# Altium PCB ATmega_2560_Pro.PcbDoc (part 4 of 4)
Units mil, origin at the board's own origin, x right, y up, seen from the top; angles counter-clockwise.
Board outline 2060 x 2060 mil, 4 copper layers (L1, L2, L3, L4), stack 61.583 mil thick; 50 components, 94 nets, 313 pads, 190 vias.
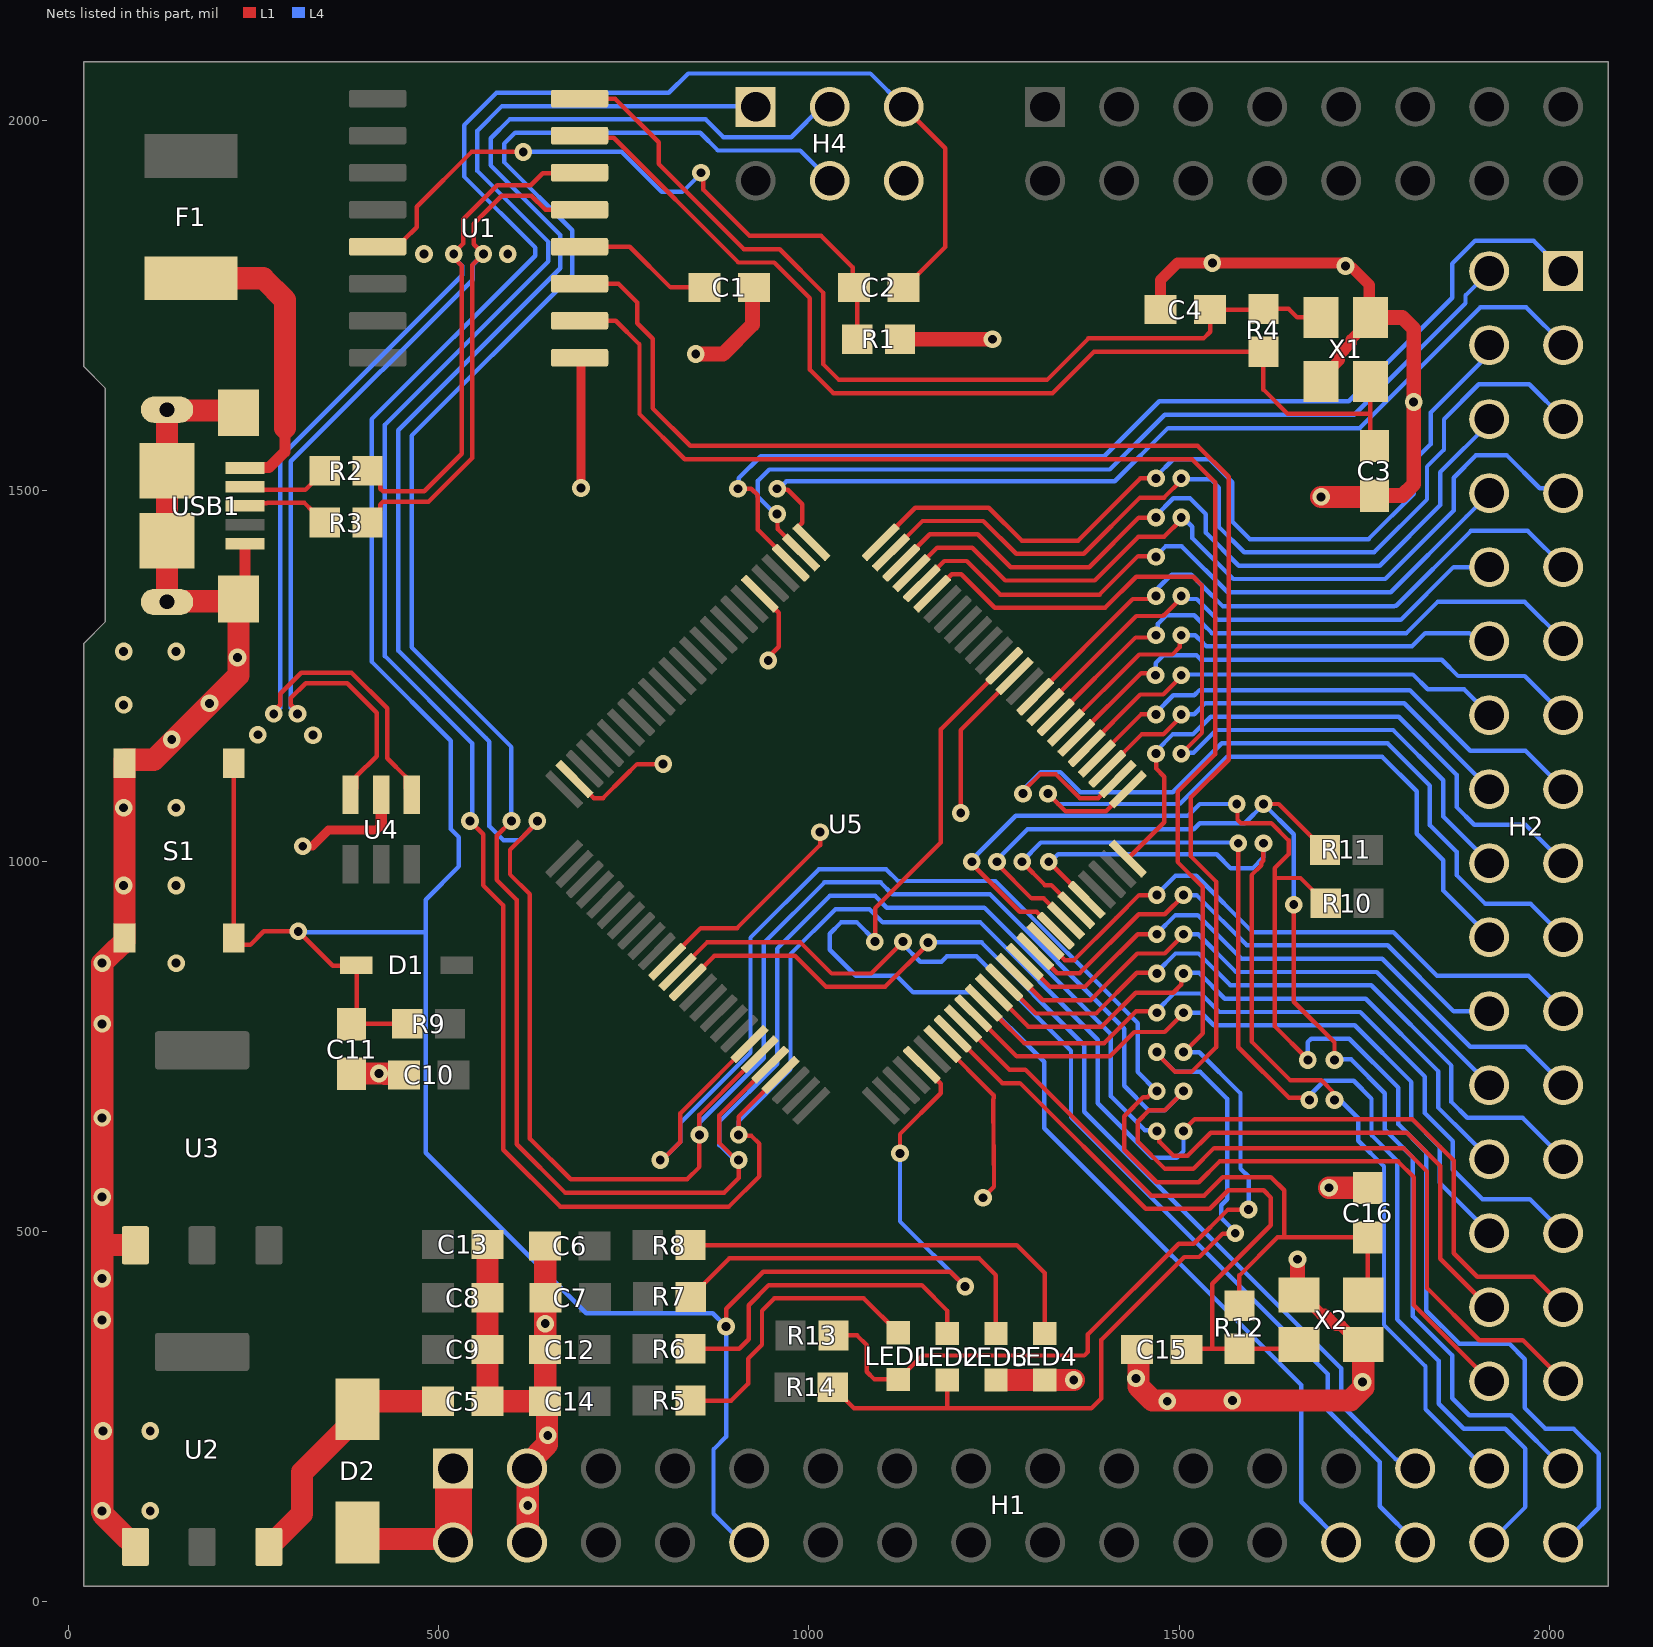
[diagram p4: the nets of this part, all layers, seen from the top]

## Via types
v1: diameter 24, hole 12, L1 to L4, tented both sides, 190 vias

## Nets (pads, with @x,y where several pads share a name; then routed paths per layer and width w, separated by ;. In a path a pad name is that pad's centre, name@x,y a point inside that pad or via, vN(x,y) a via of type N, cw(c..) or ccw(c..) an arc to the next point about the centre after c; other vN are vias at no path point) (continued)
D15: H1.26 U5.63 | length 1714.7
  L1 w6: v1(1089,891) 1089.31,891.31 1089.31,936.31 1178,1025 1178,1177.75 1244.48,1244.24 1244.48,1244.48 U5.63@1263.8,1263.8
  L4 w6: v1(1089,891) 1089,892.77 1064.77,917 1043.23,917 1028,901.77 1028,880.23 1063.23,845 1118.32,845 1140.91,822.4 1224.4,822.4 1318,728.81 1318,639 1665,292 1665,134.23 H1.26@1720,79.23
D16: H1.27 U5.13 | length 1417.8
  L1 w6: U5.13@816.63,816.88 U5.13@816.88,816.88 ; U5.13@836.2,836.2 836.44,836.2 872.24,872 981,872 1023,830 1102.77,830 1161,888.23 v1(1161,890)
  L4 w6: v1(1161,890) 1233.18,890 1372,751.18 1372,661.37 1719,314.37 1719,265.46 1793.06,191.4 1795.4,191.4 1807.57,179.23 H1.27@1820,179.23
D17: H1.28 U5.12 | length 1510.3
  L1 w6: U5.12@822.28,850.12 862.16,890 988.46,890 1030.46,848 1084,848 v1(1127,891)
  L4 w6: v1(1127,891) 1127,887.23 1150.23,864 1179,864 1186.36,871.36 1226.36,871.36 1354,743.72 1354,653.91 1701,306.91 1701,258 1771,188 1771,128.23 H1.28@1820,79.23
D18: H1.29 U5.46 | length 1411
  L1 w6: v1(1324,999) 1324,998.86 1375.16,947.7 U5.46@1375.16,947.55 ; v1@1614,1025 1614,1000.57 1611,997.57 1611,994 1598,981 1598,756 1650,704 1692,704 v1@1710,686
  L4 w6: v1(1324,999) 1326.51,999 1336.51,1009 1551,1009 1570,990 1599.11,990 1614,1004.89 v1(1614,1024) ; v1@1710,680 1714.33,680 1742,652.33 1742,622.22 1776.89,587.33 1776.89,373.2 1833,317.09 1833,259.09 1912.86,179.23 H1.29@1920,179.23
  other v1: 1710,677
D19: H1.30 U5.45 | length 1648.6
  L1 w6: v1(1288,999) 1288,998.23 1318.76,967.47 1327.15,967.47 1360.99,933.63 U5.45@1361.24,933.63 ; v1@1580,1025 1580,748.54 1648.54,680 v1@1676,680
  L4 w6: v1(1288,999) 1288,999.77 1313.23,1025 v1@1580,1025 ; v1@1676,680 1676,682.77 1696.23,703 1735.93,703 1760,678.93 1760,629.67 1794.89,594.79 1794.89,380.66 1851,324.54 1851,266.54 1884.54,233 1940.78,233 1968,205.78 1968,127.23 H1.30@1920,79.23
  other v1: 1676,677 1580,1024
D20: H1.31 R11.1 U5.44 | length 1743.1
  L1 w6: v1(1254,999) 1254,996.23 1300.76,949.47 1317.31,949.47 1327.75,939.03 1328,939.03 U5.44@1347.32,919.71 ; v1(1614,1077) 1634.67,1077 1696.67,1015 R11.1@1697.06,1015 ; v1(1655,941) 1655,810 1710,755 v1(1710,731)
  L4 w6: v1(1254,999) 1254,1001.77 1295.23,1043 1520,1043 1528,1051 1588.77,1051 v1@1614,1076.23 ; v1(1614,1077) 1655,1036 v1(1655,941) ; v1@1710,732 1732.38,732 1778,686.38 1778,637.13 1816,599.13 1816,385 1869,332 1869,274 1892,251 1948.23,251 H1.31@2020,179.23
D21: H1.32 R10.1 U5.43 | length 2035.1
  L1 w6: v1(1220,999) 1220,996.23 1284.76,931.47 1307.48,931.47 1333.15,905.79 U5.43@1333.4,905.79 ; v1(1578,1077) 1578.97,1076.03 1578.97,1055.69 1583.66,1051 1624.77,1051 1648,1027.77 1648,1009.12 1629,990.12 1629,977 ; v1@1674,732 1629,777 1629,977 ; R10.1@1698.06,943 1664.06,977 1629,977
  L4 w6: v1(1220,999) 1220,1001.77 1279.23,1061 1512,1061 1528,1077 v1(1578,1077) ; v1@1674,733 1674,755.31 1678.69,760 1729.84,760 1796,693.84 1796,644.58 1834,606.58 1834,392.46 1878.46,348 1946,348 1967,327 1967,261 1995,233 2033,233 2067,199 2067,126.23 H1.32@2020,79.23
  other v1: 1674,731
D22: H2.01 U5.78 | length 1447.6
  L1 w6: v1(904,1503) 922,1503 931,1494 931,1447.39 U5.78@975.39,1403
  L4 w6: v1@902,1503 905.06,1506.06 905.06,1517.38 934.69,1547 1399.09,1547 1473.09,1621 1729.09,1621 1869.04,1760.96 1869.04,1807.22 1899.91,1838.08 1979.03,1838.08 H2.01@2020,1797.12
D23: H2.02 U5.77 | length 1232.8
  L1 w6: v1@954.58,1468.42 957.47,1465.53 957.47,1451.53 958,1451 958,1448.23 U5.77@989.31,1416.92
  L4 w6: v1@954,1469 954,1469.23 931,1492.23 931,1513.77 946.23,1529 1406.54,1529 1480.54,1603 1736.54,1603 1887.04,1753.5 1887.04,1764.16 H2.02@1920,1797.12
  other v1: 957,1469
D24: H2.03 U5.76 | length 1292.4
  L1 w6: v1@954,1503 955.47,1501.53 971.47,1501.53 991,1482 991,1457.12 985.04,1451.16 985.04,1449.02 U5.76@1003.23,1430.84
  L4 w6: v1(957,1503) 959.51,1503 969.51,1513 1413.17,1513 1485.17,1585 1744,1585 1907,1748 1969.12,1748 H2.03@2020,1697.12
D25: H2.04 U5.75 | length 1156.5
  L1 w6: U5.75@1096.77,1430.84 1097.01,1430.84 1143.55,1477.37 1243.03,1477.37 1287.41,1433 1363.78,1433 1447.78,1517 v1(1469,1517)
  L4 w6: v1@1469.47,1510.47 1469.47,1520.24 1492.23,1543 1541,1543 1572,1512 1572,1458.65 1595.65,1435 1756.06,1435 1817,1495.94 1817,1540.37 1840,1563.37 1840,1606 1920,1686 H2.04@1920,1697.12
D26: H2.05 U5.74 | length 1214.6
  L1 w6: U5.74@1110.69,1416.92 1110.93,1416.92 1153.39,1459.37 1235.58,1459.37 1279.95,1415 1371.24,1415 1447.24,1491 1479.77,1491 1503,1514.23 v1(1503,1517)
  L4 w6: v1@1513.33,1516 1542.54,1516 1554,1504.54 1554,1451.19 1588.19,1417 1763.52,1417 1835,1488.48 1835,1532.91 1858,1555.91 1858,1597 1905,1644 1973.11,1644 H2.05@2020,1597.12
D27: H2.06 U5.73 | length 1039
  L1 w6: U5.73@1124.61,1403 1124.85,1403 1163.23,1441.37 1228.12,1441.37 1272.49,1397 1378.69,1397 1445.69,1464 v1(1469,1464)
  L4 w6: v1@1469,1458 1469,1466.77 1492.23,1490 1514.79,1490 1536,1468.79 1536,1443.73 1580.73,1399 1770.97,1399 1853,1481.03 1853,1525.46 1920,1592.46 H2.06@1920,1597.12
D28: H2.07 U5.72 | length 1110.6
  L1 w6: U5.72@1138.53,1389.08 1138.77,1389.08 1173.07,1423.37 1220.67,1423.37 1265.04,1379 1386.15,1379 1445.15,1438 1479.77,1438 1503,1461.23 v1(1503,1464)
  L4 w6: v1(1503,1464) 1505.69,1464 1518,1451.69 1518,1436.28 1573.28,1381 1778.43,1381 1871,1473.57 1871,1518 1901,1548 1943,1548 1987.39,1503.61 2013.5,1503.61 H2.07@2020,1497.12
D29: H2.08 U5.71 | length 907.2
  L1 w6: U5.71@1152.45,1375.16 1152.69,1375.16 1182.91,1405.37 1213.21,1405.37 1258.58,1360 1392.61,1360 1444.61,1412 v1@1469,1412
  L4 w6: v1@1469,1412 1469,1412.31 1481.69,1425 1503.82,1425 1565.82,1363 1785.88,1363 1889,1466.12 H2.08@1920,1497.12
  other v1: 1469,1411
D30: H2.09 U5.60 | length 867.3
  L1 w6: U5.60@1305.56,1222.04 1437.52,1354 v1@1469,1354
  L4 w6: v1@1469,1356.77 1472.06,1359.83 1472.06,1369.06 1490,1387 1516.37,1387 1531.37,1372 1559.37,1344 1791,1344 1792,1345 1793.34,1345 1894.34,1446 1971.12,1446 H2.09@2020,1397.12
  other v1: 1469,1358
D31: H2.10 U5.59 | length 703.4
  L1 w6: U5.59@1319.48,1208.12 1319.48,1208.37 1442.11,1331 1478,1331 1479,1332 1479.77,1332 1503,1355.23 v1@1503,1356
  L4 w6: v1@1503,1354 1523.91,1354 1551.91,1326 1799.8,1326 1870.91,1397.12 H2.10@1920,1397.12
  other v1: 1503,1358
D32: H2.11 U5.58 | length 800.3
  L1 w6: U5.58@1333.4,1194.21 1441.19,1302 v1@1469,1302
  L4 w6: v1@1469,1304 1471.47,1306.47 1471.47,1320.47 1483,1332 1513.77,1332 ; 1513.8,1332.03 1520.43,1332.03 1532.46,1320 1544.46,1308 1807.25,1308 1849.25,1350 1967.12,1350 H2.11@2020,1297.12
  other v1: 1469,1305
D33: H2.12 U5.57 | length 648.2
  L1 w6: U5.57@1347.32,1180.29 1446.03,1279 1491,1279 1501.03,1289.03 1501.03,1300.03 v1@1503,1302
  L4 w6: v1@1503,1304 1504.03,1305.03 1521.97,1305.03 1533,1294 1537,1290 1814.71,1290 1832.71,1308 1892.35,1308 1894.44,1305.91 1911.21,1305.91 H2.12@1920,1297.12
  other v1: 1503,1305
D34: H2.13 U5.56 | length 750.8
  L1 w6: U5.56@1361.24,1166.37 1448.69,1253.81 1466.19,1253.81 v1@1468,1252
  L4 w6: v1@1468,1250 1468.47,1250.47 1468.47,1267.47 1479,1278 1523.54,1278 1529.54,1272 1855,1272 1877,1250 1967.12,1250 H2.13@2020,1197.12
  other v1: 1468,1251
D35: H2.14 U5.55 | length 609.4
  L1 w6: U5.55@1375.16,1152.45 1447.71,1225 1478.77,1225 1503,1249.23 v1(1503,1251)
  L4 w6: v1@1503,1252 1816.03,1252 1836.03,1232 1885.12,1232 H2.14@1920,1197.12
D36: H2.15 U5.54 | length 726.3
  L1 w6: U5.54@1389.08,1138.53 1448.55,1198 v1(1469,1198)
  L4 w6: v1(1469,1198) 1469,1200.77 1492.23,1224 1520.72,1224 1527.72,1231 1811.57,1231 1893.57,1149 1968.12,1149 H2.15@2020,1097.12
D37: H2.16 U5.53 | length 603.2
  L1 w6: U5.53@1403,1124.61 1449.39,1171 1478.77,1171 1503,1195.23 v1(1503,1198)
  L4 w6: v1(1503,1198) 1503.38,1198.38 1520.56,1198.38 1535.18,1213 1804.12,1213 H2.16@1920,1097.12
D38: H2.17 U5.50 | length 848.2
  L1 w6: U5.50@1430.84,1003.23 1480,1052.4 1480,1114 1469,1125 v1@1469,1146
  L4 w6: v1@1469,1146 1469,1148.77 1491.23,1171 1518.63,1171 1542.63,1195 1796.66,1195 1875,1116.66 1875,1073 1899,1049 1968.12,1049 H2.17@2020,997.12
  other v1: 1469,1145
D39: H2.18 U5.70 | length 1184.7
  L1 w6: U5.70@1166.37,1361.24 1166.61,1361.24 1192.75,1387.37 1205.76,1387.37 1251.13,1342 1400.06,1342 1442.06,1384 1519.37,1384 1531,1372.37 1531,1173 v1@1506,1148
  L4 w6: v1(1503,1145) 1504.43,1146.43 1519.51,1146.43 1550.09,1177 1789.2,1177 1857,1109.2 1857,1060.12 H2.18@1920,997.12
D40: H2.19 U5.52 | length 1105.7
  L1 w6: v1(1289,1091) 1289,1093.77 1312.23,1117 1333.77,1117 1365.76,1085.01 1390.99,1085.01 1416.67,1110.69 U5.52@1416.92,1110.69
  L4 w6: v1@1289,1092 1289,1095.87 1313.13,1120 1339.77,1120 1366.77,1093 1491.54,1093 1557.54,1159 1781.75,1159 1839,1101.75 1839,1048.4 1875,1012.4 1875,981 1914,942 1946.28,942 1975.12,942 H2.19@2020,897.12
D41: H2.20 U5.51 | length 917.9
  L1 w6: v1(1323,1091) 1346.99,1067.01 1400.83,1067.01 1430.59,1096.77 U5.51@1430.84,1096.77
  L4 w6: v1(1323,1091) 1337,1077 1501,1077 1565,1141 1774.29,1141 1821,1094.29 1821,1037 1857,1001 1857,960.12 H2.20@1920,897.12
D42: H2.21 U5.42 | length 834.5
  L1 w6: U5.42@1319.48,891.88 1319.73,891.88 1345.4,866.2 1358.14,866.2 1414.76,922.81 1445.95,954 v1(1470,954)
  L4 w6: v1(1470,954) 1470,954.77 1495.23,980 1523.19,980 1599.19,904 1789.48,904 1848.48,845 1972.12,845 H2.21@2020,797.12
D43: H2.22 U5.41 | length 735.4
  L1 w6: U5.41@1305.56,877.96 1305.81,877.96 1335.56,848.2 1365.6,848.2 1445.4,928 1480.77,928 1506,953.23 v1(1506,954)
  L4 w6: v1@1506.47,953.53 1524.2,953.53 1591.73,886 1782.03,886 1870.91,797.12 H2.22@1920,797.12
D44: H2.23 U5.40 | length 877.3
  L1 w6: U5.40@1291.64,864.04 1325.72,829.96 1372.82,829.96 1391.05,848.2 1391.2,848.2 1444,901 v1@1469,901
  L4 w6: v1(1470,901) 1470,901.77 1495.23,927 1525.28,927 1584.28,868 1774.57,868 1893.57,749 1968.12,749 H2.23@2020,697.12
D45: H2.24 U5.39 | length 779.9
  L1 w6: U5.39@1277.72,850.12 1315.88,811.96 1380.42,811.96 1443.46,875 1480.77,875 1506,900.23 v1(1506,901)
  L4 w6: v1(1506,901) 1525.82,901 1576.82,850 1767.12,850 H2.24@1920,697.12
D46: H2.25 U5.38 | length 951.7
  L1 w6: U5.38@1263.8,836.2 1264.05,836.2 1306.28,793.96 1387.87,793.96 1442.91,849 v1@1470,849
  L4 w6: v1@1470,849 1470,849.77 1495.23,875 1526.37,875 1569.37,832 1759.66,832 1868,723.66 1868,674.41 1889.41,653 1964.12,653 H2.25@2020,597.12
  other v1: 1470,848
D47: H2.26 U5.37 | length 859.1
  L1 w6: U5.37@1250.13,822.28 1296.45,775.96 1298.83,775.96 1395.33,775.96 1441.37,822 1492,822 1503.03,833.03 1503.03,845.03 v1(1506,848)
  L4 w6: v1@1506,849 1526.91,849 1561.91,814 1752.2,814 1850,716.2 1850,666.95 1892.69,624.26 1892.85,624.26 H2.26@1920,597.12
D48: H2.27 U5.36 | length 1020.3
  L1 w6: U5.36@1235.96,808.36 1255.28,789.04 1255.53,789.04 1290.57,754 1398.82,754 1441.82,797 v1@1470,797
  L4 w6: v1@1470,797 1470,797.77 1493.23,821 1529.46,821 1554.46,796 1744.75,796 1832,708.75 1832,659.5 1870,621.5 1870,583 1909.97,543.03 1974.09,543.03 H2.27@2020,497.12
  other v1: 1470,795
D49: H2.28 U5.35 | length 929.2
  L1 w6: U5.35@1222.04,794.44 1241.36,775.12 1241.61,775.12 1280.73,736 1283.11,736 1406.28,736 1439.28,769 1480.77,769 1506,794.23 v1@1506,796.23
  L4 w6: v1(1506,795) 1530,795 1547,778 1737.29,778 1814,701.29 1814,652.04 1852,614.04 1852,565.12 H2.28@1920,497.12
GND: C1.1 C3.1 C4.1 C5.1 C6.1 C7.1 C8.1 C9.1 C10.2 C11.1 C12.1 C13.1 C14.1 C15.1 C16.1 H1.03 H1.04 H4.06 LED3.C LED4.C R1.2 S1.A S1.B U1.1 U2.1 U3.1 U4.2 U5.11 U5.32 U5.62 U5.81 U5.99 USB1.5 USB1.S1 USB1.S2 USB1.S3 USB1.S4 USB1.S5 USB1.S6 X1.2 X1.4 X2.2 X2.4 | length 6007.8
  L1 w6: U5.99@683.08,1110.69 683.33,1110.69 709.01,1085.01 721.75,1085.01 750.52,1113.78 767.74,1131 v1(803,1131) ; U5.11@808.36,864.04 853.71,909.39 902.85,909.39 1015,1021.54 v1@1015,1040 ; U5.81@933.63,1361.24 933.63,1360.99 959.31,1335.31 959.31,1289.64 945,1275.33 v1(945,1271) ; U5.32@1180.29,752.68 1247.98,684.98 1249.74,683.23 1249.74,680.74 1249.74,680.04 ccw(c1274,674) 1249,673.78 1250,560 v1(1235,545) ; v1(1205,1065) 1205,1176.92 1277.72,1249.64 U5.62@1277.72,1249.88
  L1 w12: v1(316,1020) 329,1020 351,1042 416,1042 422,1048 ; U1.1@690,1680 692,1678 v1(692,1504)
  L1 w15: USB1.S2@229.06,1353.94 237.92,1362.8 USB1.5@237.92,1428.74 ; 422,1048 U4.2@422,1089.56 ; C4.1@1475.07,1745 1475.07,1785.07 1498,1808 1718.56,1808 1722.56,1804 v1(1725,1804) 1726.72,1802.28 1732.72,1802.28 1757,1778 1757,1735.9 X1.2@1758.46,1734.44 1758.46,1730.5 1732.66,1704.69 1732.66,1699.63 1716.71,1683.68 1716.71,1676.67 1707.92,1667.88 1707.66,1667.88 1691.54,1651.76 X1.4@1691.54,1647.82 ; X2.4@1666.19,413.45 1691.99,387.65 1697.06,387.65 1712.37,372.33 1719.12,372.33 1744.93,346.53 X2.2@1748.86,346.53
  L1 w20: C11.1@381.99,712.53 C11.1@382.75,711.76 ; v1(847,1685) 884,1685 923.5,1724.5 C1.1@923.5,1775 ; R1.2@1122.94,1705 v1(1248,1705) ; v1(1660,462) 1660,415.7 X2.4@1662.25,413.45 ; X1.2@1758.46,1734.44 1801.56,1734.44 1817,1719 v1(1817,1620) 1817,1509 1801.97,1493.97 1764.43,1493.97 C3.1@1764,1493.54
  L1 w30: v1@45,120 v1@45,227 ; v1@45,229 45,481 ; v1@46.21,116.94 79.06,84.09 86.54,84.09 89.84,80.79 U2.1@89.84,73.31 ; S1.A@74.94,891.2 63.31,879.57 62.57,879.57 v1(45,862) v1(45,780) v1(45,653) v1(45,546) 45,481 ; S1.A@75.18,895.89 75.18,967 75.18,1072 S1.B@75.18,1132.11 75.18,1136.56 75.42,1136.8 114.8,1136.8 229.06,1251.06 USB1.S2@229.06,1353.94 226.16,1351.04 133.64,1351.04 USB1.S6@132.6,1350 USB1.S3@132.6,1432.68 USB1.S4@132.6,1527.17 USB1.S5@132.6,1609.84 133.64,1608.8 226.16,1608.8 USB1.S1@229.06,1605.91 ; U3.1@89.65,481 45,481 ; C11.1@382.75,711.76 383.99,713 v1(419,713) 426.68,713 427.03,712.65 448.92,712.65 C10.2@449.8,711.76 ; C13.1@565.46,482.02 C8.1@565.46,409.98 C9.1@565.46,339.98 C5.1@565.46,269.98 C14.1@643.53,269.98 ; H1.04@620,79.23 v1(620,129.23) 620,179.23 620,185.71 646,211.71 646,267.52 C14.1@643.53,269.98 ; C6.1@643.54,479.98 643.68,479.84 643.68,410.01 C7.1@643.82,409.86 643.68,409.72 643.68,340.13 C12.1@643.54,339.98 C14.1@643.53,269.98 ; LED3.C@1252.61,298.67 v1(1357.67,298.67) ; C15.1@1443.07,340 1445.1,337.98 1445.1,289.9 1464,271 v1(1572,271) 1731.29,271 1748.86,288.57 X2.2@1748.86,346.53 ; v1(1692,1492) 1762.46,1492 C3.1@1764,1493.54 ; v1(1702.46,558.46) C16.1@1755,558.46
  other v1: 45,122 110,122 647,224 46,230 110,230 1484,270 1748,296 1442,301 643.68,374.92 45,380 45,436 145,862 74,967 145,967 1015,1039 74,1072 145,1072 139,1164 330,1170 255.3,1170.53 74,1211 190,1213 228,1275 74,1283 145,1283 1545,1808 480,1820 593,1820
MISO: H2.29 H4.01 U5.22 | length 4292.2
  L1 w6: v1(542,1054) 560,1036 560,967 587,940 587,610 663.89,533.11 891.88,533.11 933,574.23 933,617.84 922.31,628.53 903.47,628.53 905,630.06 905,654.7 941.91,691.6 942.15,691.6 U5.22@961.47,710.92 ; v1@1507,637 1521,651 1815.37,651 1871,595.37 1871,470 1902.92,438.08 1979.03,438.08 H2.29@2020,397.12
  L4 w6: v1(542,1054) 545,1057 545,1158.9 427,1276.9 427,1589.37 648,1810.37 648,1836.32 552,1932.32 552,1986.75 585.25,2020 H4.01@928,2020 ; v1@903.15,631.15 905,633 905,648.63 975,718.63 975,874.23 1035.77,935 1081.77,935 1099.77,917 1231.63,917 1390,758.63 1390,672.7 1463.7,599 1497,599 1506,608 v1(1506,635)
  other v1: 905,630
MOSI: H2.30 H4.04 U5.21 | length 4258
  L1 w6: v1(598,1054) 578,1034 578,974.46 605,947.46 605,617.46 670.46,552 885.31,552 905,571.69 v1(905,596) ; v1@902,596 879,619 879,656.53 927.99,705.52 928.23,705.52 U5.21@947.55,724.84 ; v1(1470,635) 1473.06,631.94 1473.06,620.94 1492,602 1511.72,602 1542.72,633 1807.91,633 1853,587.91 1853,462.54 1918.43,397.12 H2.30@1920,397.12
  L4 w6: v1@598,1057 598,1153.98 463,1288.98 463,1574.46 680,1791.46 680,1852.4 588,1944.4 588,1969.14 602.86,1984 853,1984 877,1960 988,1960 H4.04@1028,1920 ; v1@902,596 899.23,596 879,616.23 879,648.09 957,726.09 957,881.68 1028.32,953 1089.23,953 1105.23,937 1237.09,937 1408,766.09 1408,682 1453.53,636.47 1468.53,636.47 v1(1470,635)
NetC1_2: C1.2 U1.4 | length 191.3
  L1 w6: U1.4@690,1830 758,1830 813,1775 C1.2@858.54,1775
NetC2_1: C2.1 R1.1 U1.13 | length 909
  L1 w6: U1.13@417.17,1830 443.94,1830 451.94,1838.01 451.94,1838.37 469.94,1856.37 469.94,1883.95 544,1958 v1(614,1958) ; v1(854,1930) 857.06,1926.94 857.06,1907.22 919.6,1844.69 1016.31,1844.69 1059,1802 1059,1776.53 1065.06,1770.47 R1.1@1065.06,1705
  L4 w6: v1(614,1958) 747,1958 801,1904 829,1904 854,1929 v1(854,1930)
NetC3_2: C3.2 R4.2 U1.7 X1.1 | length 1446.6
  L1 w6: U1.7@690,1980 692.72,1977.28 736.09,1977.28 904.69,1808.69 952.92,1808.69 1001,1760.6 1001,1664 1033,1632 1329,1632 1385.06,1688.06 R4.2@1614,1688.06 1614,1637 1646.54,1604.46 1758.46,1604.46 ; X1.1@1758.46,1647.82 1758.46,1604.46 ; C3.2@1764,1560.46 1758.46,1566 1758.46,1604.46
NetC4_2: C4.2 R4.1 U1.8 X1.3 | length 1294.7
  L1 w6: U1.8@690,2030 738,2030 797,1971 797,1941.83 912.14,1826.69 960.37,1826.69 1019,1768.06 1019,1671.46 1040.46,1650 1321.54,1650 1377.61,1706.06 1533.06,1706.06 1542,1715 C4.2@1542,1745 1613.06,1745 R4.1@1614,1745.94 1648.06,1745.94 1659.56,1734.44 X1.3@1691.54,1734.44
NetC5_2: C5.2 D2.C U2.3 | length 360.1
  L1 w30: U2.3@270.16,73.31 270.16,80.79 273.46,84.09 280.94,84.09 315,118.15 315,174 373.54,232.54 375.47,232.54 390,247.06 D2.C@390,259.27 ; D2.C@385.73,255 400.72,269.98 C5.2@498.54,269.98
NetF1_1: F1.1 USB1.1 | length 407.3
  L1 w15: USB1.1@237.92,1531.1 238.29,1531.48 270.48,1531.48 292,1553 292,1585.18
  L1 w30: F1.1@165,1787.32 262.68,1787.32 292,1758 292,1585.18
NetLED1_A: LED1.A R5.2 | length 403.9
  L1 w6: R5.2@839.94,271 895,271 918,294 918,327.72 936.49,346.21 936.49,392.49 953,409 1074.09,409 LED1.A@1120.59,362.51
NetLED2_A: LED2.A R6.2 | length 454.5
  L1 w6: R6.2@840,341.01 905.83,341.01 918.49,353.66 918.49,399.94 945.54,427 1152.17,427 1186.6,392.57 LED2.A@1186.6,361.66
NetLED3_A: LED3.A R7.2 | length 522.3
  L1 w6: R7.2@840.23,411.02 840.63,411.02 856.7,427.1 856.7,427.49 892.24,463.03 1229.97,463.03 1252.61,440.39 LED3.A@1252.61,361.66
NetLED4_A: LED4.A R8.2 | length 575.9
  L1 w6: R8.2@840,481.03 1280.97,481.03 1318.62,443.38 LED4.A@1318.62,361.66
NetR2_1: R2.1 USB1.2 | length 119.7
  L1 w6: USB1.2@237.92,1505.51 241.64,1501.8 319.64,1501.8 345.15,1527.3 R2.1@345.54,1527.3
NetR3_1: R3.1 USB1.3 | length 119.7
  L1 w6: USB1.3@237.92,1479.92 241.64,1483.64 267.64,1483.64 267.8,1483.8 318.38,1483.8 328.81,1473.37 329.07,1473.37 344.89,1457.55 R3.1@344.89,1457.29
RESET: C2.2 C11.2 D1.2 H1.10 H4.05 R9.1 S1.C S1.D U5.30 | length 4852.4
  L1 w6: S1.D@222.82,1132.11 S1.C@222.82,895.89 222.82,890.97 227.19,886.6 244.9,886.6 263.3,905 v1(310,905) 356.5,858.5 386.49,858.5 389,855.99 389,785.01 C11.2@385.93,781.94 ; C11.2@384,780.01 R9.1@457.13,780.01 ; v1(888,371) 888.09,371.09 888.09,395 938.09,445 1191,445 v1(1211,425) ; v1(1123,605) 1123,631.05 1178.12,686.18 1178.12,698.92 1171.77,705.28 1171.77,705.52 U5.30@1152.45,724.84 ; C2.2@1127.46,1775 1129.43,1775 1184,1829.57 1184,1963 H4.05@1128,2019
  L4 w6: v1(310,905) 311,904 482,904 ; H1.10@920,79.23 909.77,79.23 871,118 871,205 888,222 v1(888,371) 870,389 699,389 482,606 482,900 482,904 ; v1(1123,605) 1123,513 v1(1211,425) ; H4.05@1128,2019 1083,2064 836.69,2064 810.69,2038 577.79,2038 534,1994.21 534,1924.86 630,1828.86 630,1817.82 409,1596.82 409,1269.44 516,1162.44 516,1043.23 527,1032.23 527,992.75 482,947.75 482,904
RXD: LED2.C R14.1 U1.3 | length 3017.8
  L1 w6: U1.3@690,1780 742.65,1780 768,1754.65 768,1726.46 789,1705.46 789,1611.46 839.46,1561 1525,1561 1567,1519 1567,1137 1516,1086 1516,1006.23 1550,972.23 1550,748.23 1516.77,715 1495,715 v1@1470,740 ; R14.1@1032,288.99 1032.39,288.99 1060.79,260.6 1186.6,260.6 ; LED2.C@1186.6,298.67 1186.6,260.6 ; v1(1576,497) 1575.3,496.3 1558.76,496.3 1527.46,465 1506.93,465 1394.8,352.87 1394.8,273.8 1381.6,260.6 1186.6,260.6
  L4 w6: v1@1470.23,740 1495.23,715 1528.54,715 1565,678.54 1565,543 1557,535 1557,517.6 1576,498.6 v1(1576,497)
  other v1: 1470,742
SCK: H2.31 H4.03 U5.20 | length 4605.7
  L1 w6: v1(633,1054) 633,1052.23 596,1015.23 596,981.91 623,954.91 623,624.91 677.91,570 835.31,570 852,586.69 852,656.88 914.31,719.2 914.31,719.44 U5.20@933.63,738.76 ; v1(1506,689) 1506,688.23 1480.77,663 1459.23,663 1444,647.77 1444,620.97 1480.97,584 1519.18,584 1547.3,612.12 1803.34,612.12 1835,580.46 1835,423 1905.55,352.45 1964.66,352.45 H2.31@2020,297.12
  L4 w6: v1@633,1056 v1(633,1054) 633,1052.23 608.77,1028 587.23,1028 568,1047.23 568,1161.35 563,1166.35 445,1284.35 445,1581.91 664,1800.91 664,1845.77 570,1939.77 570,1976.6 595.4,2002 860.46,2002 884.42,1978.03 976.03,1978.03 1018,2020 H4.03@1028,2020 ; v1@850,630 851.7,631.7 851.7,646.24 939,733.54 939,889.14 1020.86,971 1096.68,971 1112.68,955 1244.54,955 1426,773.54 1426,696.23 1459.23,663 1480.77,663 1506,688.23 v1(1506,689)
  other v1: 852,630
SS: H2.32 U5.19 | length 2164.7
  L1 w6: v1@798,596 801.77,596 826,620.23 826,658.97 836,668.97 U5.19@919.71,752.68 ; v1(1470,689) 1465.67,689 1457.67,681 1451.78,681 1426,655.23 1426,609.91 1469.91,566 1526.63,566 1554.75,594.12 1795.88,594.12 1817,573 1817,400.12 H2.32@1920,297.12
  L4 w6: v1@798,596 801.77,596 826,620.23 826,646 921,741 921,896.59 1013.41,989 1104.14,989 1120.14,973 1230.77,973 1252,973 1444,781 1444,715 v1(1470,689)
  other v1: 799,596
TXD: LED1.C R13.1 U1.2 | length 2795.5
  L1 w6: U1.2@690,1730 739,1730 771,1698 771,1604 832,1543 1517.54,1543 1549,1511.54 1549,1144.46 1498,1093.46 1498,998.77 1532,964.77 1532,767 v1@1506,741 ; R13.1@1033,359 1065,359 1078,346 1078,310 1088.49,299.51 LED1.C@1120.59,299.51 1152.99,331.91 1372.12,331.91 1376.8,336.6 1376.8,360.33 1499.48,483 1520,483 1566,529 v1(1594,529)
  L4 w6: v1(1506,742) 1506.47,741.53 1527.47,741.53 1583,686 1583,584.34 1594,573.34 v1@1594,532
USB_N: R2.2 U1.6 U4.1 | length 1741.6
  L1 w6.23: v1@277.88,1198.86 277.88,1203.51 285.77,1211.39 285.77,1226.1 313.9,1254.23 381.89,1254.23 430,1206.12 430,1139 455.45,1113.55 455.45,1097.44 U4.1@463.34,1089.56 ; R2.2@403.41,1527.3 403.81,1527.3 420.77,1510.34 420.77,1503.06 424.42,1499.41 480,1499.41 531.05,1550.46 531.05,1804.53 520.48,1815.1 520.48,1822.07 532.69,1834.28 532.69,1867.14 578.79,1913.23 624.23,1913.23 640.34,1929.34 689.34,1929.34 U1.6@690,1930
  L4 w6.23: v1@277.88,1198.86 285.77,1206.74 285.77,1545.77 531.4,1791.4 531.4,1803.95 520,1815.35 v1(520,1820)
  other v1: 276.88,1198.86
USB_P: R3.2 U1.5 U4.3 | length 1695.6
  L1 w6.23: v1@307.88,1198.86 307.88,1203.51 300,1211.39 300,1220.2 319.8,1240 376,1240 415.77,1200.23 415.77,1141.77 388.55,1114.55 388.55,1097.44 U4.3@380.66,1089.56 ; R3.2@403.41,1457.29 403.81,1457.29 420.77,1474.25 420.77,1481.53 424.42,1485.18 485.89,1485.18 545.28,1544.57 545.28,1805.28 v1@557.32,1817.32 ; v1(560,1820) 560,1820.23 546.92,1833.31 546.92,1861.24 584.68,1899 625,1899 644,1880 U1.5@690,1880
  L4 w6.23: v1@307.88,1198.86 300,1206.74 300,1539.88 545.63,1785.51 545.63,1805.63 v1(560,1820)
  other v1: 308.88,1198.86
VIN: D2.A H1.01 H1.02 | length 235.6
  L1 w30: D2.A@390,92.73 398.92,83.81 515.42,83.81 H1.02@520,79.23
  L1 w50: H1.02@520,79.23 H1.01@520,179.23
XTAL1: C16.2 R12.1 U5.34 X2.3 | length 928
  L1 w6: U5.34@1208.12,780.52 1208.37,780.52 1270.89,718 1275.66,718 1292.46,718 1462.46,548 1534.09,548 1559.09,573 1624,573 1642,555 1642,491.54 ; R12.1@1581.55,398.94 1581.55,440.09 1632.99,491.54 1642,491.54 ; X2.3@1748.86,413.45 1755,419.59 C16.2@1755,491.54 1642,491.54
XTAL2: C15.2 R12.2 U5.33 X2.1 | length 933.2
  L1 w6: U5.33@1194.21,766.6 1194.45,766.6 1261.05,700 1285,700 1455,530 1541.54,530 1566.54,555 1614.31,555 1624,545.31 1624,508 1545,429 1545,342 ; C15.2@1510,340 1511.06,341.06 R12.2@1581.55,341.06 1656.79,341.06 X2.1@1662.25,346.53
pads on no net: U1.9 U1.10 U1.11 U1.12 U1.14 U1.15 U2.4 U4.4 U4.6 U5.4 U5.8 U5.9 U5.14 U5.27 U5.28 U5.29 U5.47 U5.48 U5.49 U5.65 U5.66 U5.67 U5.68 U5.69 U5.79 USB1.4

## Polygon pours and split planes (outlines as drawn)
GND on L1 "NONET_L-01_P-001" (solid, pour order 29): 30,1670 60,1640 60,1320 30,1290 30,30 2070,30 2070,2070 30,2070
3.3V on L1 "NONET_L-01_P-001" (solid, pour order 0): 115,775 245,775 255,765 255,645 305,645 415,535 415,465 445,435 520,435 530,425 530,320 520,310 470,310 395,385 350,430 350,500 285,565 245,565 205,525 205,450 195,440 155,440 140,455 140,670 105,705 105,765
+5V on L1 "NONET_L-01_P-001" (solid, pour order 2): 160,40 200,40 220,60 220,110 255,145 255,215 240,230 170,230 145,205 145,55
+5V on L1 "NONET_L-01_P-001" (solid, pour order 3): 320,370 340,390 340,415 310,445 310,520 285,545 255,545 230,520 230,420 280,370
+5V on L1 "NONET_L-01_P-001" (solid, pour order 5): 425,565 425,535 465,495 465,465 480,450 515,450 530,465 530,535 485,580 440,580
+5V on L1 "NONET_L-01_P-001" (solid, pour order 6): 699.5,45.62 739.38,45.62 740,45 760,65 760,220 775,235 800,235 805,240 805,440 800,445 755,445 745,455 745,500 730,515 690,515 680,505 680,65
+5V on L1 "NONET_L-01_P-001" (solid, pour order 8): 405.13,955.13 450,955 480,925 535,925 545,915 545,880 555,870 555,765 535,745 500,745 490,755 490,845 475,845 395,925 395,945
+5V on L1 "NONET_L-01_P-001" (solid, pour order 10): 1042.65,1373.79 1067.65,1373.79 1082.65,1358.79 1082.35,1331.21 1067.65,1318.79 1042.65,1318.79 1027.65,1333.79 1027.65,1358.79
+5V on L1 "NONET_L-01_P-001" (solid, pour order 11): 1247.18,1166.15 1272.18,1166.15 1287.18,1151.15 1286.87,1123.57 1272.18,1111.15 1247.18,1111.15 1232.18,1126.15 1232.18,1151.15
+5V on L1 "NONET_L-01_P-001" (solid, pour order 12): 798.2,1097.81 823.2,1097.81 838.2,1082.81 837.89,1055.22 823.2,1042.81 798.2,1042.81 783.2,1057.81 783.2,1082.81
+5V on L1 "NONET_L-01_P-001" (solid, pour order 13): 935.15,1078.79 960.15,1078.79 975.15,1063.79 974.85,1036.21 960.15,1023.79 935.15,1023.79 920.15,1038.79 920.15,1063.79
+5V on L1 "NONET_L-01_P-001" (solid, pour order 14): 1184.44,617.79 1209.44,617.79 1224.44,602.79 1224.13,575.21 1209.44,562.79 1184.44,562.79 1169.44,577.79 1169.44,602.79
+5V on L1 "NONET_L-01_P-001" (solid, pour order 15): 45,1995 90,2040 255,2040 295,2000 295,1900 250,1855 90,1855 45,1900
+5V on L1 "NONET_L-01_P-001" (solid, pour order 16): 300,1852.5 325,1852.5 340,1837.5 339.69,1809.91 325,1797.5 300,1797.5 285,1812.5 285,1837.5
+5V on L1 "NONET_L-01_P-001" (solid, pour order 17): 1741.38,1045 1730,1035 1730,925 1740,915 1800,915 1845,960 1845,995 1795,1045
VIN on L1 "NONET_L-01_P-001" (solid, pour order 20): 497.37,220.61 497.98,220 550,220 565,205 565,40 555,30 355,30 345,40 345,145 355,155 431.75,155
NetC5_2 on L1 "NONET_L-01_P-001" (solid, pour order 21): 520,290 520,250 475,250 425,200 365,200 330,165 330,100 300,70 300,45 250,45 250,100 280,130 280,230 355,305 425,305 435,295 515,295
NetF1_1 on L1 "NONET_L-01_P-001" (solid, pour order 22): 285.91,1569.09 299.09,1569.09 310,1580 310,1765 245,1830 70,1830 50,1810 50,1715 70,1695 255,1695 275,1675 275,1580
GND on L3 "NONET_L-01_P-001" (solid, pour order 30): 30,1668 60,1639 60,1320 30,1290 30,30 2070,30 2070,2070 30,2070
+5V on L3 "NONET_L-01_P-001" (solid, pour order 19): 175,110 225,110 270,155 270,230 295,255 360,255 660,255 680,235 680,65 705,40 745,40 770,65 770,280 720,330 445,330 390,385 390,420 410,440 455,440 565,550 565,730 565,820 610,865 705,960 907.5,960 940,932.14 940,750 1035,655 1135,655 1160,630 1160,590 1185,565 1225,565 1250,590 1250,675 1160,765 1055,765 1030,790 1030,990 984.84,1035.16 984.84,1055 965,1070 965,1105 1090,1230 1195,1230 1215,1210 1215,1125 1235,1105 1270,1105 1280,1115 1330,1115 1415,1030 1500,1030 1570,1100 1625,1100 1720,1005 1720,960 1765,915 1825,915 1860,950 1860,1005 1700,1165 1555,1165 1485,1095 1450,1095 1325,1220 1325,1295 1200,1420 1150,1420 1105,1465 1105,1790 1020,1875 935,1960 905,1960 885,1940 885,1880 1010,1755 1010,1285 830,1105 570,1105 505,1170 505,1305 435,1375 435,1905 365,1975 220,1975 165,1920 165,1850 225,1790 295,1790 335,1750 335,1315 420,1230 420,995 385,960 385,900 440,845 440,702.18 400,662.18 400,620 270,490 150,370 150,310 150,225 130,205 130,155
3.3V on L3 "NONET_L-01_P-001" (solid, pour order 1): 806.67,44.24 807.42,45 835,45 855,65 855,365 720,500 530,500 460,430 415,430 400,415 400,390 450,340 525,340 590,405 695,405 780,320 780,70 805,45
GND on L4 "NONET_L-01_P-001" (solid, pour order 31): 30,1668 60,1639 60,1320 30,1290 30,30 2070,30 2070,2070 30,2070
GND on L2 (split plane): 2059.9,40.1 40.1,40.1 40.1,1285.68 63.21,1308.79 65.71,1311.83 67.57,1315.31 68.71,1319.08 69.1,1323 69.1,1639 68.71,1642.92 67.57,1646.69 65.71,1650.17 63.21,1653.21 40.1,1676.32 40.1,2059.9 2059.9,2059.9

## Silkscreen, mask and mechanical layers (free items; w line width, h text height)
Top Overlay:
  lines w4: 539,518 869,518 869,661 539,661 539,518
  text "A4" at 1093,1999.77 h20 r90
  text "A0" at 1284,1999.77 h20 r90
  text "A2" at 1384,1999.77 h20 r90
  text "A4" at 1484,1999.77 h20 r90
  text "A6" at 1584,1999.77 h20 r90
  text "A8" at 1684,1999.77 h20 r90
  text "SCK" at 993,1994.77 h20 r90
  text "A10" at 1784,1994.77 h20 r90
  text "A12" at 1884,1994.77 h20 r90
  text "A14" at 1984,1994.77 h20 r90
  text "MISO" at 893,1984.77 h20 r90
  text "ICSP" at 835,1945.77 h20 r90
  text "5V" at 893,1902.77 h20 r90
  text "A1" at 1284,1902.77 h20 r90
  text "A3" at 1384,1902.77 h20 r90
  text "A5" at 1484,1902.77 h20 r90
  text "A7" at 1584,1902.77 h20 r90
  text "A9" at 1684,1902.77 h20 r90
  text "A11" at 1784,1897.77 h20 r90
  text "GND" at 1093,1892.77 h20 r90
  text "A13" at 1884,1892.77 h20 r90
  text "A15" at 1984,1892.77 h20 r90
  text "MOSI" at 993,1887.77 h20 r90
  text "D23" at 1884,1772.88 h20 r90
  text "D22" at 1984,1772.88 h20 r90
  text "D25" at 1884,1670.88 h20 r90
  text "D24" at 1984,1670.88 h20 r90
  text "D27" at 1884,1572.88 h20 r90
  text "D26" at 1984,1572.88 h20 r90
  text "D29" at 1884,1470.88 h20 r90
  text "D28" at 1984,1470.88 h20 r90
  text "D31" at 1884,1372.88 h20 r90
  text "D30" at 1984,1372.88 h20 r90
  text "D33" at 1884,1270.88 h20 r90
  text "D32" at 1984,1270.88 h20 r90
  text "D35" at 1884,1172.88 h20 r90
  text "D34" at 1984,1172.88 h20 r90
  text "D37" at 1884,1070.88 h20 r90
  text "D36" at 1984,1070.88 h20 r90
  text "D39" at 1884,972.88 h20 r90
  text "D38" at 1984,972.88 h20 r90
  text "D41" at 1884,870.88 h20 r90
  text "D40" at 1984,870.88 h20 r90
  text "D43" at 1884,772.88 h20 r90
  text "D42" at 1984,772.88 h20 r90
  text "D45" at 1884,670.88 h20 r90
  text "D44" at 1984,670.88 h20 r90
  text "D47" at 1884,572.88 h20 r90
  text "D46" at 1984,572.88 h20 r90
  text "| C13 | C6  | R8 | / | C8  | C7  | R7 | / | C9  | C12 | R6 | / | C5  | C14 | R5 |" at 543,526 h20
  text "D49" at 1884,470.88 h20 r90
  text "D48" at 1984,470.88 h20 r90
  text "MOSI" at 1884,372.88 h20 r90
  text "MISO" at 1984,372.88 h20 r90
  text "SS" at 1884,290.88 h20 r90
  text "SCK" at 1984,270.88 h20 r90
  text "5V" at 684,165 h20 r90
  text "D0" at 984,165 h20 r90
  text "D2" at 1084,165 h20 r90
  text "D4" at 1184,165 h20 r90
  text "D6" at 1284,165 h20 r90
  text "D8" at 1384,165 h20 r90
  text "VIN" at 484,155 h20 r90
  text "GND" at 584,155 h20 r90
  text "3V3" at 784,155 h20 r90
  text "AREF" at 884,155 h20 r90
  text "D10" at 1484,155 h20 r90
  text "D12" at 1584,155 h20 r90
  text "D14" at 1684,155 h20 r90
  text "D16" at 1784,155 h20 r90
  text "D18" at 1884,155 h20 r90
  text "D20" at 1984,155 h20 r90
  text "5V" at 684,63 h20 r90
  text "D1" at 984,63 h20 r90
  text "D3" at 1084,63 h20 r90
  text "D5" at 1184,63 h20 r90
  text "D7" at 1284,63 h20 r90
  text "D9" at 1384,63 h20 r90
  text "VIN" at 484,53 h20 r90
  text "GND" at 584,53 h20 r90
  text "3V3" at 784,53 h20 r90
  text "RST" at 884,53 h20 r90
  text "D11" at 1484,53 h20 r90
  text "D13" at 1584,53 h20 r90
  text "D15" at 1684,53 h20 r90
  text "D17" at 1784,53 h20 r90
  text "D19" at 1884,53 h20 r90
  text "D21" at 1984,53 h20 r90
Bottom Overlay:
  drawing of 20 lines, arcs and shapes, not listed
  text "MCU: ATmega2560 / USB-TTL: CH340G / POWER IN: 7-9V / VOUT: 5V/800mA. 3.3V/800mA." at 805,1870 h30
  text "MEGA-2560-PRO" at 1615,480 h100
  text "Designed by kousik <23/09/2026>" at 1407,378 h45
Top Solder:
  drawing of 19 lines, arcs and shapes, not listed
Board Shape:
  lines w20: 0,0 0,2100 2100,2100 2100,0 0,0

## Text inside footprints (layer, text, board x,y; h text height)
USB1: Mechanical 13 "PCB END" at 85.36,1288.98 h16 r270